# EAGLE board Wemos_ZVV (EAGLE 7.7.0)
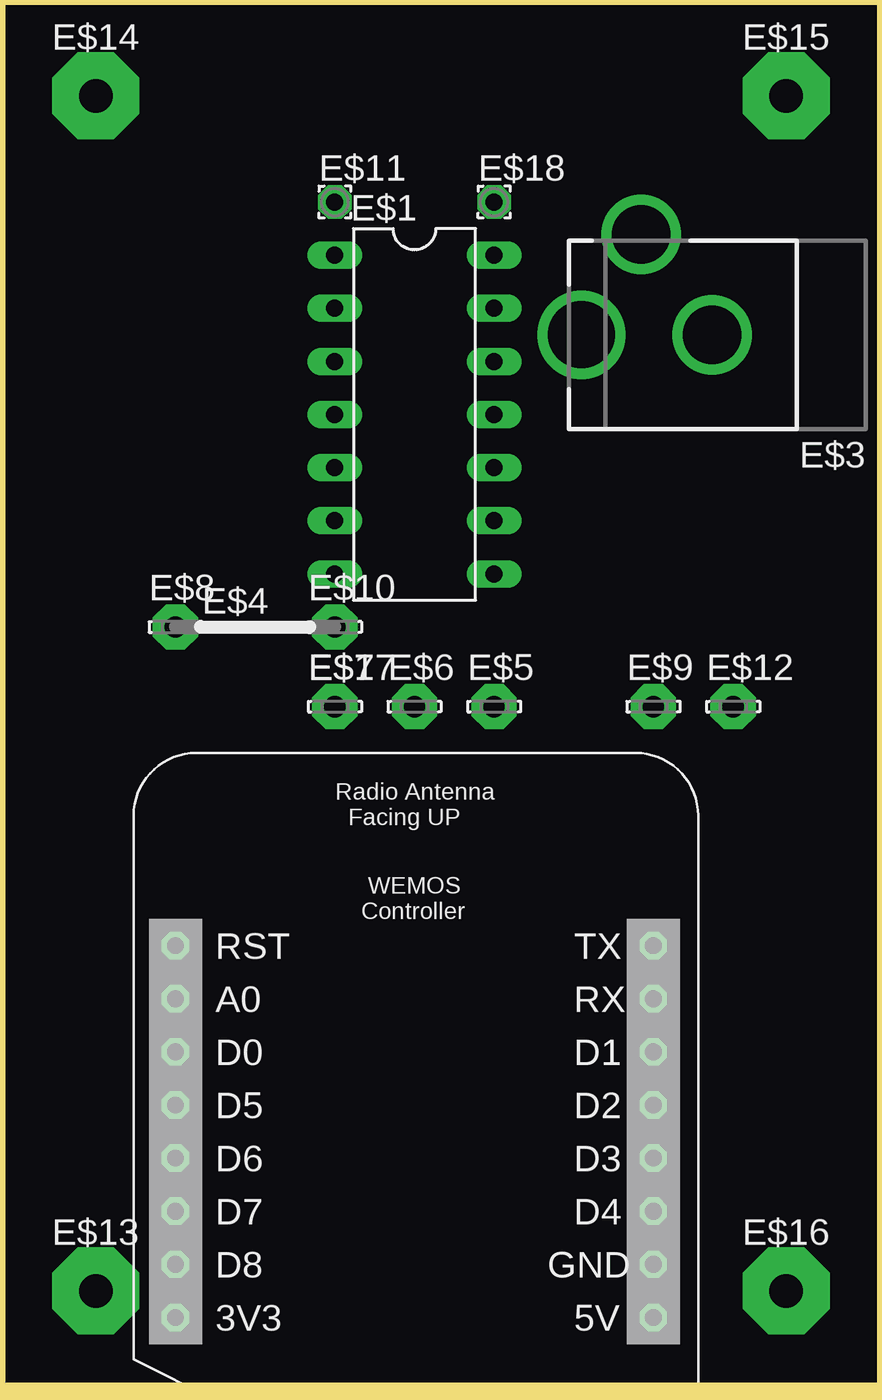
[diagram p0: board, top side]
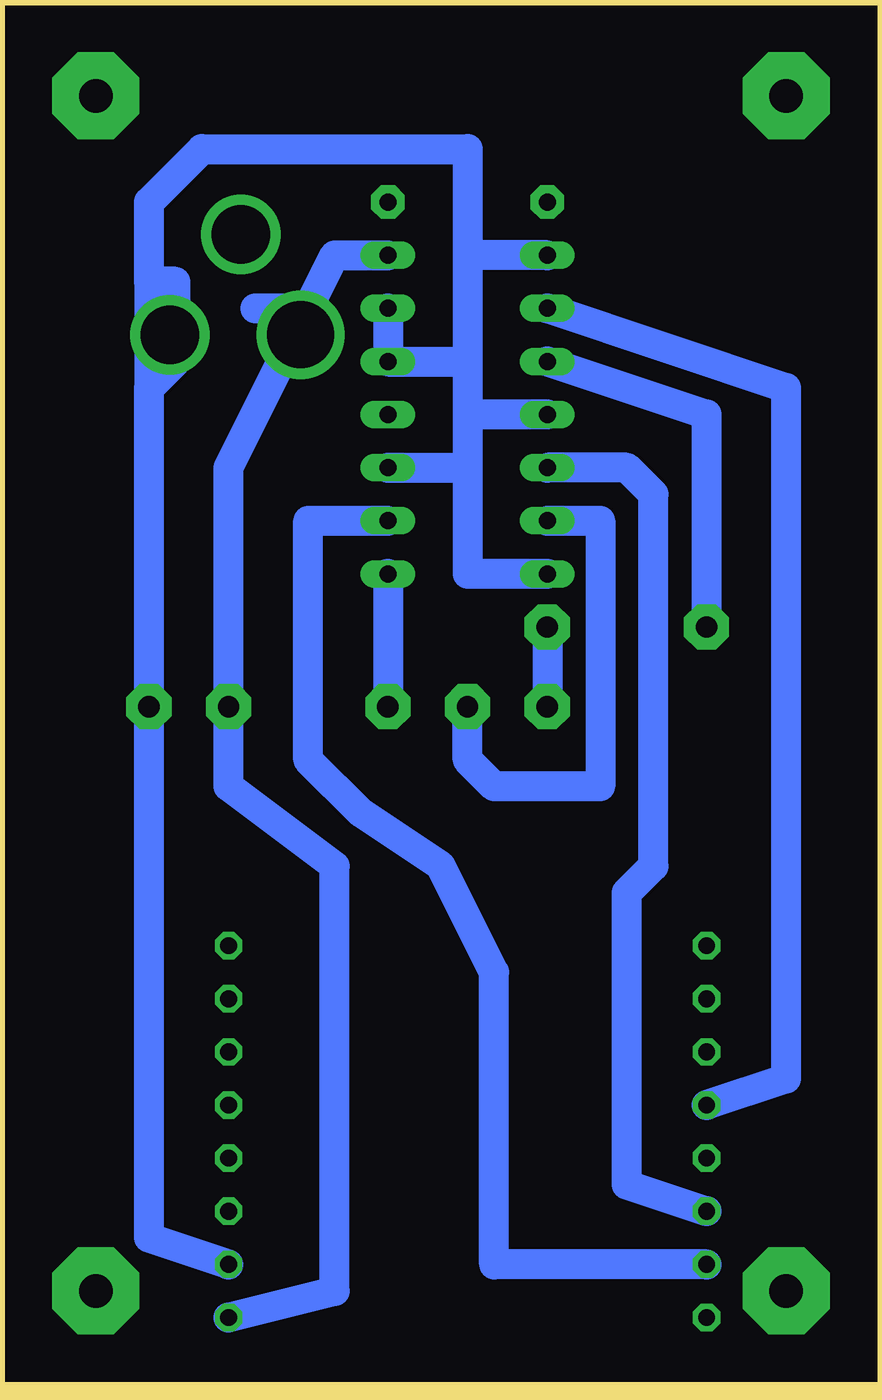
[diagram p1: board, bottom side, seen from below]

No outline drawn. Coordinates in mm, seen from the top.
Copper layers (1*16): Top 0.035mm / dielectric 1.5mm / Bottom 0.035mm
Design rules "default": minimum track width 10mil, minimum drill 24mil, track to track 8mil, track to pad 8mil, pad to pad 8mil, via to via 8mil, smd to smd 8mil, copper to edge 40mil, drill to drill 8mil, minimum pad ring 10mil, minimum via ring 8mil, stop-mask expansion 4mil, vias tented up to drill 0mil, thermal gap 10mil
Milling: 4 lines

## Footprints (pad centres in the part's own frame; a part is rotated, then mirrored left to right if it is on the bottom)
DIL14 = drill 0.813 long: 1 -7.62,-3.81; 2 -5.08,-3.81; 3 -2.54,-3.81; 4 0,-3.81; 5 2.54,-3.81; 6 5.08,-3.81; 7 7.62,-3.81; 8 7.62,3.81; 9 5.08,3.81; 10 2.54,3.81; 11 0,3.81; 12 -2.54,3.81; 13 -5.08,3.81; 14 -7.62,3.81
WEMOS = drill 0.8 octagon: 3V3 0,0; 5V 22.86,0; A0 0,15.24; D0 0,12.7; D1 22.86,12.7; D2 22.86,10.16; D3 22.86,7.62; D4 22.86,5.08; D5 0,10.16; D6 0,7.62; D7 0,5.08; D8 0,2.54; GND 22.86,2.54; RST 0,17.78; RX 22.86,15.24; TX 22.86,17.78
DCJACK_2MM_PTH = drill 2.8: GND 0,7.35; GNDBREAK 4.8,10.75 | drill 3.2: PWR 0,13.6
07 = drill 0.813 pad 1.6 octagon: 1 -3.81,0; 2 3.81,0
LSP10 = drill 1.016 pad 2.159 octagon: MP 0,0
1,6/0,8 = drill 0.813 pad 1.6 octagon: 1 0,0
4,16O1,6 = drill 1.6 pad 4.166 octagon: 1 0,0

## Placement (x,y rotation side)
E$1  74HCT125  [DIL14]  15.24,52.07 270 top
E$2  [WEMOS]  3.81,8.89 0 top
E$3  [DCJACK_2MM_PTH]  36.83,55.88 90 top
E$4  [07]  7.62,41.91 0 top
E$5  [LSP10]  19.05,38.1 0 top
E$6  [LSP10]  15.24,38.1 0 top
E$7  [LSP10]  11.43,38.1 0 top
E$8  [LSP10]  3.81,41.91 0 top
E$9  [LSP10]  26.67,38.1 0 top
E$10  [LSP10]  11.43,41.91 0 top
E$11  [1,6/0,8]  11.43,62.23 0 top
E$12  [LSP10]  30.48,38.1 0 top
E$13  [4,16O1,6]  0,10.16 0 top
E$14  [4,16O1,6]  0,67.31 0 top
E$15  [4,16O1,6]  33.02,67.31 0 top
E$16  [4,16O1,6]  33.02,10.16 0 top
E$17  [LSP10]  11.43,38.1 0 top
E$18  [1,6/0,8]  19.05,62.23 0 top

## Library data of the parts
E$1 = 74xx-us
E$2 = 1455413453956-wemos
E$3 = adafruit
E$4 = jumper
E$5-E$10 E$12 E$17 = solpad
E$11 E$13-E$16 E$18 = wirepad

## Nets
S$2: E$1.1 E$1.4 E$1.7 E$1.10 E$1.12 E$1.13 E$2.GND
S$3: E$1.14 E$2.5V
S$4: E$1.2 E$2.D5
S$5: E$1.5 E$2.D7
S$6: E$1.9 E$2.D8
S$7: E$1.8 E$5.MP
S$8: E$1.6 E$6.MP
S$9: E$1.3 E$8.MP
S$10: E$7.MP E$10.MP

## Tracks (layer width: path | path; a pad name or v marks a point on that pad's centre or on a via)
S$2
  Bottom 1.422: E$2.GND 30.48,12.7 30.48,53.34 | 30.48,58.42 30.48,53.34 | 30.48,53.34 29.21,54.61 29.21,58.42 30.48,58.42 | 30.48,58.42 30.48,62.23 27.94,64.77 15.24,64.77 15.24,59.69 | 15.24,59.69 15.24,54.61 | 15.24,54.61 15.24,52.07 | 15.24,52.07 15.24,49.53 | 15.24,49.53 15.24,44.45 E$1.7 | E$1.4 15.24,52.07 | 15.24,54.61 E$1.12 E$1.13 | E$1.10 15.24,49.53 | E$1.1 15.24,59.69
S$3
  Bottom 1.422: E$2.5V 21.59,10.16 21.59,30.48 26.67,34.29 26.67,49.53 24.13,54.61 | 24.13,54.61 21.59,59.69 E$1.14 | 25.4,57.15 24.13,57.15 24.13,54.61
S$4
  Bottom 1.422: E$2.D5 0,20.32 0,53.34 E$1.2
S$5
  Bottom 1.422: E$2.D7 7.62,15.24 7.62,29.21 6.35,30.48 6.35,48.26 7.62,49.53 E$1.5
S$6
  Bottom 1.422: E$2.D8 13.97,11.43 13.97,25.4 16.51,30.48 20.32,33.02 22.86,35.56 22.86,46.99 E$1.9
S$7
  Bottom 1.422: E$1.8 E$5.MP
S$8
  Bottom 1.422: E$1.6 8.89,46.99 8.89,34.29 13.97,34.29 15.24,35.56 E$6.MP
S$9
  Bottom 1.422: E$1.3 3.81,52.07 E$8.MP
S$10
  Bottom 1.422: E$10.MP E$7.MP